# EAGLE board arduino_adapter_sister (EAGLE 7.3.0)
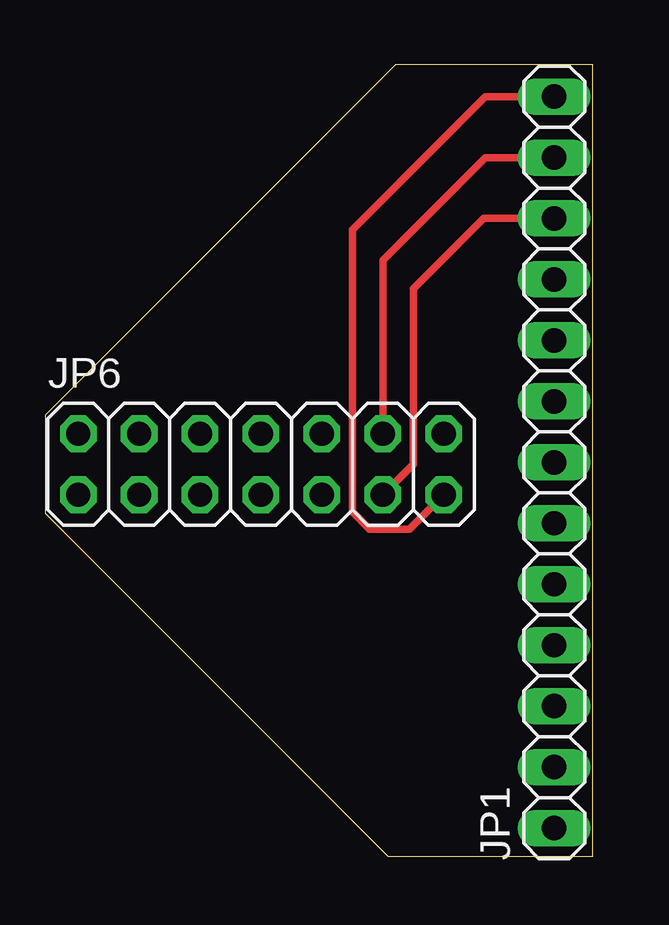
[diagram p0: board, top side]
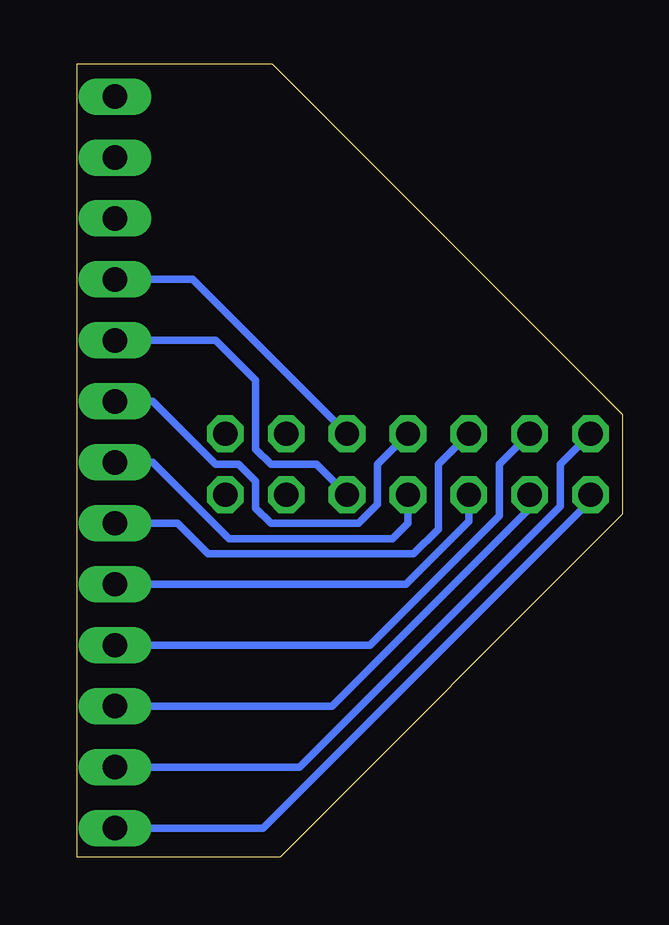
[diagram p1: board, bottom side, seen from below]

No outline drawn. Coordinates in mm, seen from the top.
Copper layers (1*16): Top 0.035mm / dielectric 1.5mm / Bottom 0.035mm
Design rules "default": minimum track width 10mil, minimum drill 24mil, track to track 8mil, track to pad 8mil, pad to pad 8mil, via to via 8mil, smd to smd 8mil, copper to edge 40mil, drill to drill 8mil, minimum pad ring 10mil, minimum via ring 8mil, stop-mask expansion 4mil, vias tented up to drill 0mil, thermal gap 10mil
Net classes: 1 vcc: width 0.254 mm
Milling: 6 lines

## Footprints (pad centres in the part's own frame; a part is rotated, then mirrored left to right if it is on the bottom)
1X13 = drill 1.016 long: 1 -15.24,0; 2 -12.7,0; 3 -10.16,0; 4 -7.62,0; 5 -5.08,0; 6 -2.54,0; 7 0,0; 8 2.54,0; 9 5.08,0; 10 7.62,0; 11 10.16,0; 12 12.7,0; 13 15.24,0
2X07 = drill 1.016 octagon: 1 -7.62,-1.27; 2 -7.62,1.27; 3 -5.08,-1.27; 4 -5.08,1.27; 5 -2.54,-1.27; 6 -2.54,1.27; 7 0,-1.27; 8 0,1.27; 9 2.54,-1.27; 10 2.54,1.27; 11 5.08,-1.27; 12 5.08,1.27; 13 7.62,-1.27; 14 7.62,1.27

## Placement (x,y rotation side)
JP1  [1X13]  21.19,16.43 90 top
JP6  [2X07]  8.97,16.35 0 top

## Library data of the parts
JP1 JP6 = pinhead

## Nets
A8: JP1.6 JP6.6
A9: JP1.3 JP6.3
A10: JP1.2 JP6.2
A11: JP1.1 JP6.1
A12: JP1.4 JP6.4
A13: JP1.5 JP6.5
A14: JP1.7 JP6.7
A15: JP1.8 JP6.8
Y9: JP1.9 JP6.9
Y10: JP1.10 JP6.10
Y11: JP1.11 JP6.11
Y12: JP1.12 JP6.12
Y13: JP1.13 JP6.13

## Tracks (layer width: path | path; a pad name or v marks a point on that pad's centre or on a via)
A8
  Bottom 0.305: JP6.6 7.7,16.35 7.7,13.65 8.73,12.62 17.3,12.62 18.57,13.89 JP1.6
A9
  Bottom 0.305: JP6.3 3.89,14.53 12.14,6.27 JP1.3
A10
  Bottom 0.305: JP6.2 2.62,16.35 2.62,14.61 13.49,3.73 JP1.2
A11
  Bottom 0.305: JP6.1 1.35,14.84 15,1.19 JP1.1
A12
  Bottom 0.305: JP6.4 5.16,16.35 5.16,14.21 10.56,8.81 JP1.4
A13
  Bottom 0.305: JP6.5 6.43,13.97 9.05,11.35 JP1.5
A14
  Bottom 0.305: JP6.7 8.97,13.89 9.6,13.26 16.43,13.26 19.61,16.43 JP1.7
A15
  Bottom 0.305: JP6.8 10.24,16.35 10.24,14.68 11.03,13.89 14.68,13.89 15.32,14.53 15.32,15.64 16.03,16.35 16.99,16.35 19.61,18.97 JP1.8
Y9
  Bottom 0.305: JP6.9 12.78,16.35 14.68,16.35 15.32,16.99 15.32,19.84 16.99,21.51 JP1.9
Y10
  Bottom 0.305: JP1.10 17.94,24.05 JP6.10
Y11
  Top 0.305: JP6.11 15.32,16.35 15.32,23.65 18.26,26.59 JP1.11
Y12
  Top 0.305: JP6.12 14.05,24.84 18.34,29.13 JP1.12
Y13
  Top 0.305: JP6.13 15.16,13.65 13.49,13.65 12.78,14.37 12.78,26.11 18.34,31.67 JP1.13